# Altium PCB InstallGuide.PcbDoc
Units mil, origin at the board's own origin, x right, y up, seen from the top; angles counter-clockwise.
Board outline 1360 x 1305 mil, 2 copper layers (Top Layer, Bottom Layer); 16 components, 9 nets, 96 pads, 18 vias.
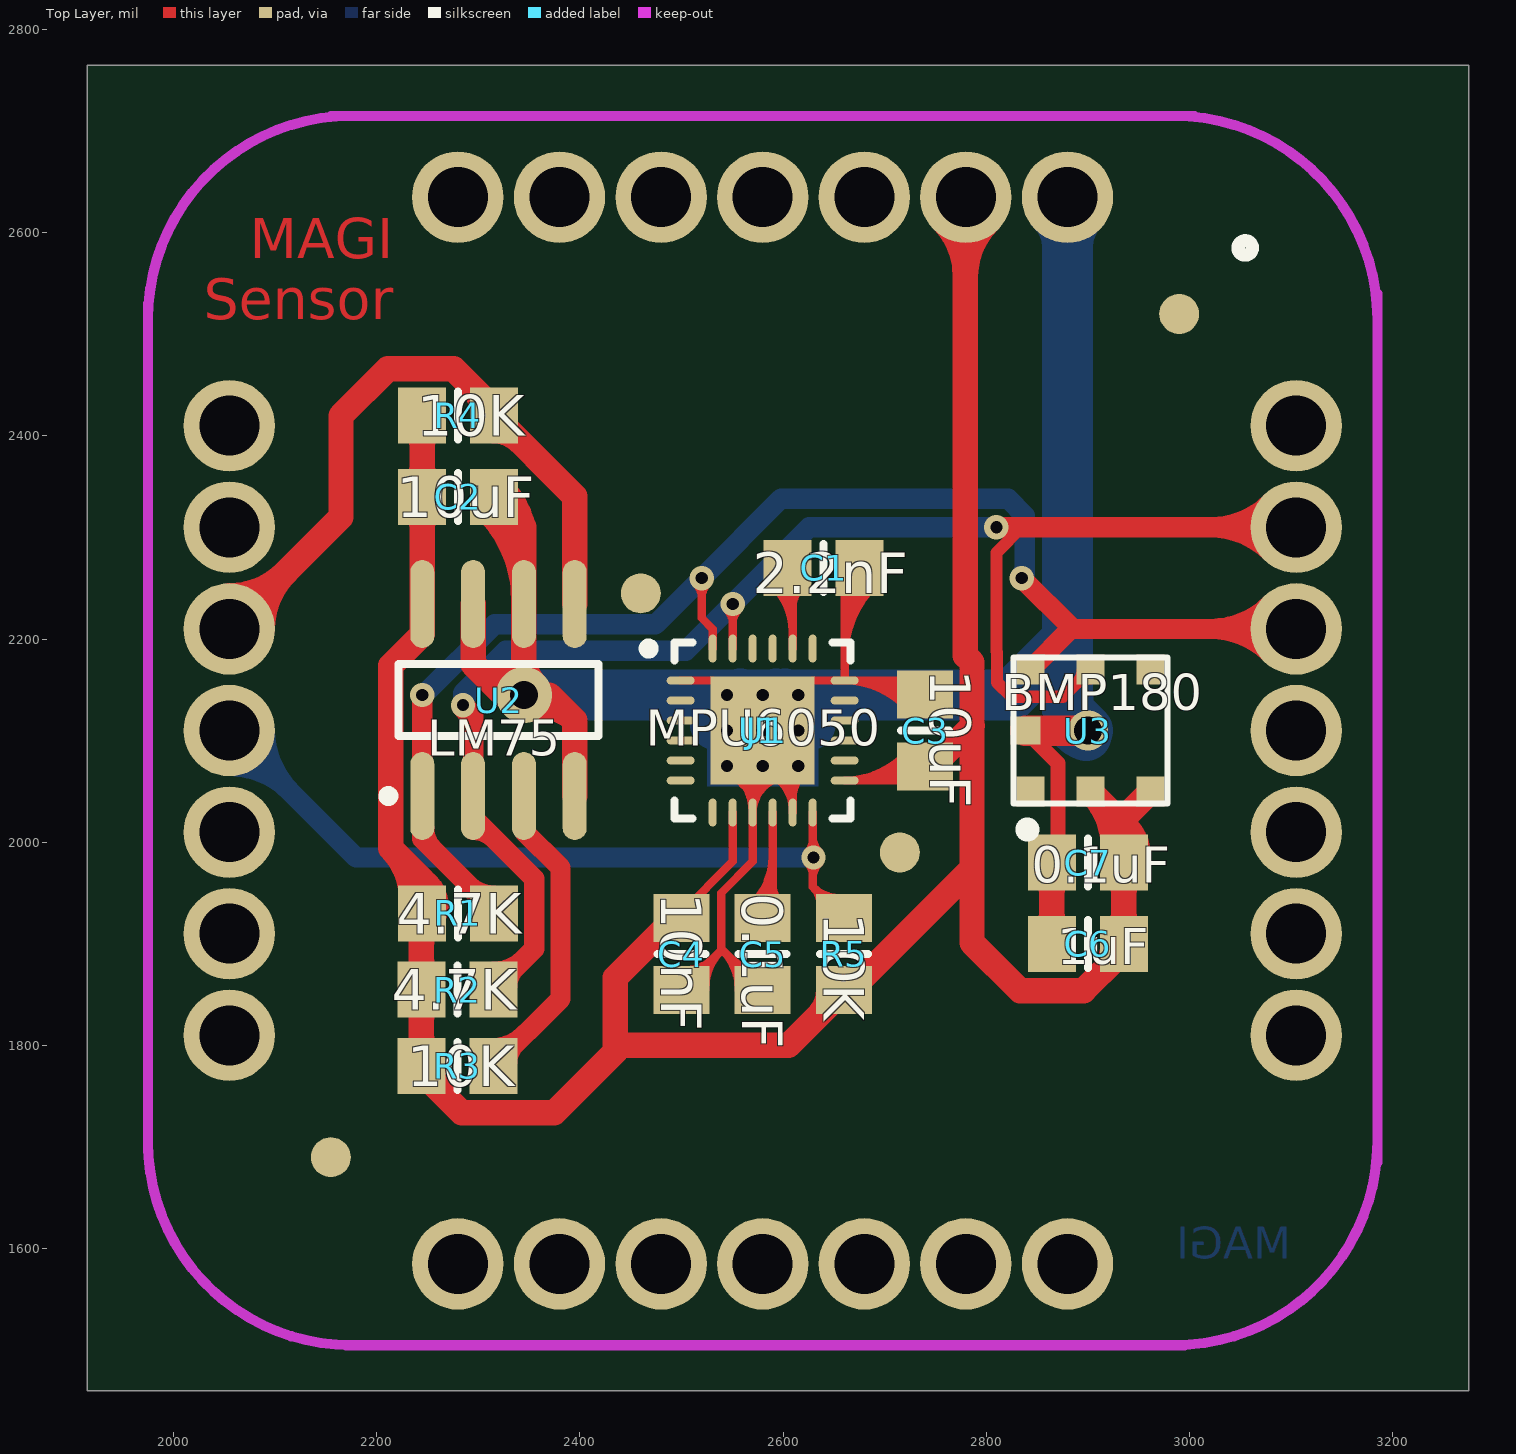
[diagram p0: Top Layer view]
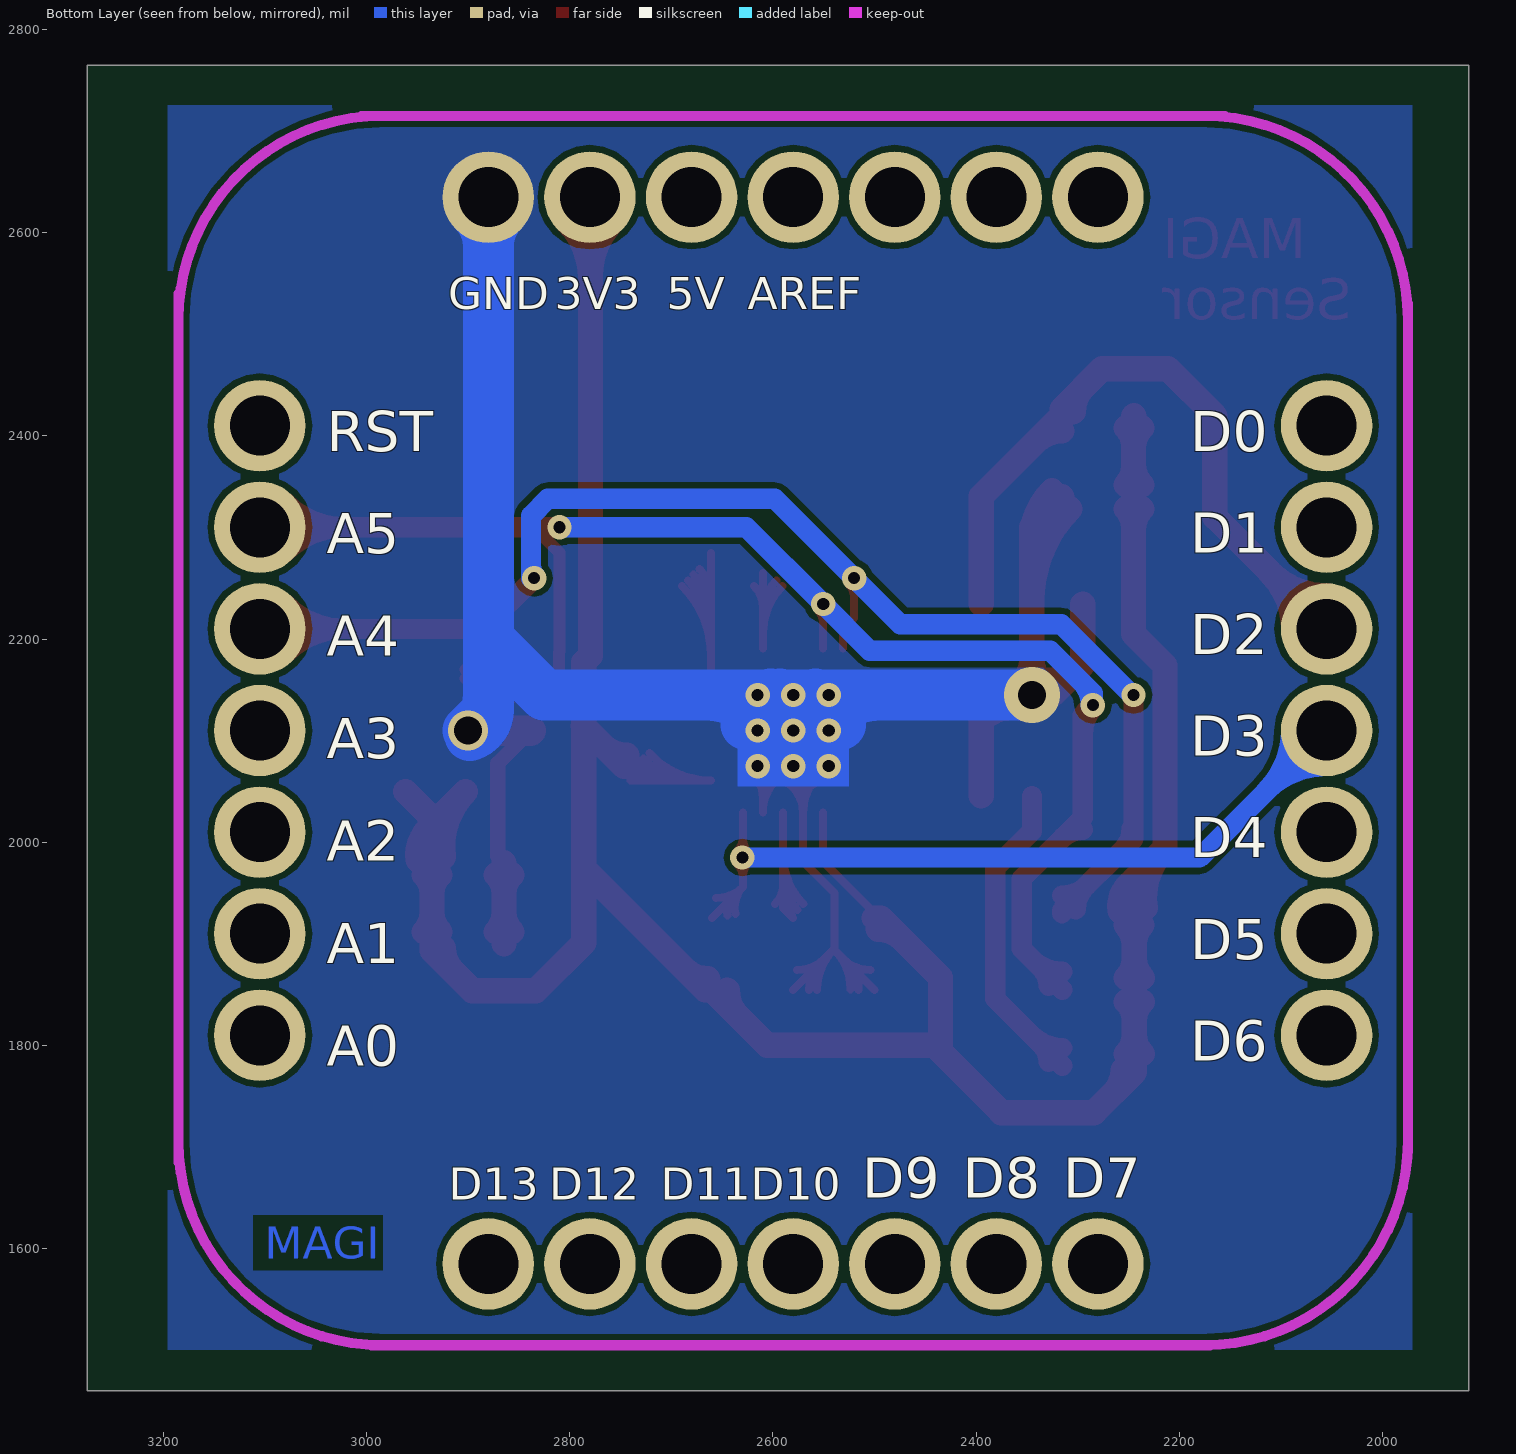
[diagram p1: Bottom Layer view, seen from below]

## Layer stack, top to bottom
Top Solder: solder mask 0.4, Solder Resist, Dk 3.5
Top Layer: signal copper 1.4
Dielectric 1: dielectric 12.6, FR-4, Dk 4.8
Bottom Layer: signal copper 1.4
Bottom Solder: solder mask 0.4, Solder Resist, Dk 3.5

## Board outline
1915,2765 1915,1460 3255,1460 3275,1460 3275,2765

## Design rules (kind name [scope] priority, off if disabled: settings)
Clearance [All] p1: gap=6
PolygonConnect PolygonConnect_1 [InNet('GND')] p1: connectstyle=Direct reliefconductorwidth=10 reliefentries=4 polygonreliefangle="90 Angle" airgapwidth=10
PolygonConnect [All] p2: connectstyle=Relief reliefconductorwidth=10 reliefentries=4 polygonreliefangle="90 Angle" airgapwidth=10
RoutingVias [All] p1: holewidth=28 width=50 viastyle="Through Hole" minholewidth=28 minwidth=50 maxholewidth=28 maxwidth=50
SolderMaskExpansion [All] p1: expansion=4
Width [All] p1: maxlimit=100 minlimit=6 preferedwidth=30
29 further rules are at their usual default settings.

## Components (designator, comment, footprint, x,y, rotation, side; value= is the part's Value field where it differs from the comment)
C1 "1uf" 6-0805_N 2640,2270 r180 top
C2 "1uf" 6-0805_N 2280,2340 r180 top
C3 "1uf" 6-0805_N 2740,2110 r270 top
C4 "1uf" 6-0805_N 2500,1890 r90 top
C5 "1uf" 6-0805_N 2580,1890 r90 top
C6 "0.1uf" 6-0805_N 2900,1900 r0 top
C7 "0.1uf" 6-0805_N 2900,1980 r0 top
J1 "MAGIsBoard" MAGIsBoard 2580,2110 r0 top
R1 "RES1_1" 6-0805_N 2280,1930 r0 top
R2 "RES1_1" 6-0805_N 2279.57,1855 r0 top
R3 "RES1_1" 6-0805_N 2279.57,1780 r0 top
R4 "RES1_1" 6-0805_N 2280,2420 r0 top
R5 "RES1_1" 6-0805_N 2660,1890 r90 top
U1 "MPU6050" MPU6050 2580,2110 r0 top
U2 "LM92" 8S1_N 2320,2140 r90 top
U3 "BMP180" BMP180 2900,2110 r0 top

## Footprints (in the part's own frame and the unit in brackets; to place one, negate y for a bottom-side part, rotate by r counter-clockwise, add the part's x,y. Pads: shape width x height; smd on the part's side, far side on the other; paste and mask are expansions set on the pad)
6-0805_N [mm] "Chip Resistor, Body 2.0x1.2mm, IPC Medium Density"
  rect 1.2x1.4 smd: 1(-0.9,0) 2(0.9,0)
  silkscreen extent 0,-0.6 0,0.6, body extent -1.07,-0.7 1.07,0.7, height 0.7
8S1_N [mm] "SOIC, 8-Leads, Body 4.9x3.9mm, Pitch 1.27mm, IPC Medium Density"
  oval 2.2x0.6 smd: 1(-2.4,1.905) 2(-2.4,0.635) 3(-2.4,-0.635) 4(-2.4,-1.905) 5(2.4,-1.905) 6(2.4,-0.635) 7(2.4,0.635) 8(2.4,1.905)
  silkscreen extent -2.52,-2.5 0.9,2.88, body extent -2,-2.5 2,2.5, height 1.75
BMP180 [mm]
  rect 0.7x0.75 smd: 1(-1.438,-1.525) 2(0.062,-1.525) 3(1.563,-1.525) 4(1.563,1.525) 5(0.062,1.525) 6(-1.438,1.525)
  rect 0.75x0.7 smd: 7(-1.562,0)
  silkscreen extent -1.86,-2.52 1.99,1.83
MAGIsBoard [mil]
  round 90 hole 59.06: 1(300,525) 2(200,525) 3(100,525) 4(0,525) 5(-100,525) 6(-200,525) 7(-300,525) 8(-525,300) 9(-525,200) 10(-525,100) 11(-525,0) 12(-525,-100) 13(-525,-200) 14(-525,-300) 15(-300,-525) 16(-200,-525) 17(-100,-525) 18(0,-525) 19(100,-525) 20(200,-525) 21(300,-525) 22(525,-300) 23(525,-200) 24(525,-100) 25(525,0) 26(525,100) 27(525,200) 28(525,300)
  Keep-Out Layer lines w10: -605,-415 -605,290 -605,420 ; -605,-405 ccw(c-405,-405) -405,-605 ; -605,405 cw(c-405,405) -405,605 ; -425,605 425,605 ; -410,-605 415,-605 ; 405,-605 ccw(c405,-405) 605,-405 ; 405,605 cw(c405,405) 605,405 ; 605,-425 605,430
  silkscreen extent 468,468 482,482
MPU6050 [mm] "QFN, 24-Leads, Body 4.00x4.00mm, Pitch 0.50mm, Thermal Pad 2.60x2.70mm, IPC Medium Density"
  oval 0.7x0.2 smd: 1(-2.05,1.25) 2(-2.05,0.75) 3(-2.05,0.25) 4(-2.05,-0.25) 5(-2.05,-0.75) 6(-2.05,-1.25) 13(2.05,-1.25) 14(2.05,-0.75) 15(2.05,-0.25) 16(2.05,0.25) 17(2.05,0.75) 18(2.05,1.25)
  oval 0.2x0.7 smd: 7(-1.25,-2.05) 8(-0.75,-2.05) 9(-0.25,-2.05) 10(0.25,-2.05) 11(0.75,-2.05) 12(1.25,-2.05) 19(1.25,2.05) 20(0.75,2.05) 21(0.25,2.05) 22(-0.25,2.05) 23(-0.75,2.05) 24(-1.25,2.05)
  rect 2.6x2.7 smd: 25(0,0)
  silkscreen extent -2.97,-2.2 2.2,2.2, body extent -2.05,-2.05 2.05,2.05, height 0.95

## Part data
C1 C2 C3 C4 C5 C6 C7: library part CAP_1, "Capacitor"
U2: library part ATtiny13A

## Free pads (board coordinates)
  round 39.37 smd mask+19.68: 10(2990,2520) 11(2155,1690) 12(2715,1990) 13(2460,2245)

## Via types
v1: diameter 24, hole 12, Top Layer to Bottom Layer, 16 vias
v2: diameter 55.12, hole 27.56, Top Layer to Bottom Layer, 1 vias
v3: diameter 39.37, hole 27.56, Top Layer to Bottom Layer, 1 vias

## Nets (pads, with @x,y where several pads share a name; then routed paths per layer and width w, separated by ;. In a path a pad name is that pad's centre, name@x,y a point inside that pad or via, vN(x,y) a via of type N, cw(c..) or ccw(c..) an arc to the next point about the centre after c; other vN are vias at no path point)
3.3V: C2.2 C3.2 C4.2 C6.2 C7.2 J1.2 R1.1 R2.1 R3.1 R4.1 R5.1 U1.8 U1.13 U2.8 U3.2 U3.3 | length 4113.6
  Top Layer w8: C4.2 2500,1930.56 2550.47,1981.03 U1.8 ; 2678.76,2060.79 ccw(c2678.76,2126.5) C3.2@2727.45,2082.37 ; 2696.81,2060.79 ccw(c2696.81,2110.14) C3.2@2733.38,2077 ; C3.2@2714.85,2060.79 ccw(c2714.85,2093.79) C3.2@2739.31,2071.63 ; C3.2@2721.52,2087.74 cw(c2660.71,2142.86) U1.13 C3.2@2740,2060.79
  Top Layer w25: R1.1@2233.56,1935.5 ccw(c2165.14,1945.21) 2214,1994.07 ; R3.1@2236.27,1791.8 ccw(c2217.28,1810.79) 2244.13,1810.79 ccw(c2270.98,1810.79) R3.1@2252,1791.8 ; R2.1@2236.27,1843.2 cw(c2217.28,1824.21) 2244.13,1824.21 cw(c2270.98,1824.21) R2.1@2252,1843.2 ; R2.1@2236.27,1866.8 ccw(c2217.28,1885.79) 2244.13,1885.79 ccw(c2270.98,1885.79) R2.1@2252,1866.8 ; R1.1@2236.7,1918.2 cw(c2218.76,1900.26) 2244.13,1900.26 ; R1.1@2236.7,1941.8 ccw(c2217.72,1960.79) 2244.57,1960.79 ccw(c2271.42,1960.79) R1.1@2252.43,1941.8 ; C2.2@2236.7,2328.2 cw(c2216.67,2308.17) 2245,2308.17 ; C2.2@2236.7,2351.8 ccw(c2216.67,2371.83) 2245,2371.83 ; R4.1@2236.7,2408.2 cw(c2216.67,2388.17) 2245,2388.17 ; 2244.13,1898.17 cw(c2272.46,1898.17) R1.1@2252.43,1918.2 ; R4.1 2245,2419.57 U2.8 2245,2205 2214,2174 2214,1994.07 ; 2245,2310.26 cw(c2270.37,2310.26) C2.2@2252.43,2328.2 ; 2245,2369.74 ccw(c2270.37,2369.74) C2.2@2252.43,2351.8 ; 2245,2390.26 cw(c2270.37,2390.26) R4.1@2252.43,2408.2 ; 2249.4,1958.67 cw(c2227.14,1936.41) R1.1@2258.31,1931.99 ; R3.1@2255.26,1776.06 ccw(c2288.24,1776.06) R3.1@2264.92,1752.74 ; C4.2@2472.74,1904.65 cw(c2496.06,1881.33) C4.2@2496.06,1914.31 ; C4.2 2493.52,1925.43 2435,1866.91 2435,1800.43 ; 2634.29,1828.86 ccw(c2608.59,1854.57) R5.1@2644.94,1854.57 ; R5.1@2663.94,1865.69 ccw(c2663.94,1898.67) R5.1@2687.26,1875.35 ; C3.2 2746.48,2074.57 2786.49,2114.57 ; C3.2@2743.94,2085.69 ccw(c2743.94,2118.67) C3.2@2767.26,2095.35 ; J1.2@2757.02,2612.02 cw(c2702.75,2557.75) 2779.5,2557.75 ; 2779.5,2555.33 cw(c2859.67,2555.33) J1.2@2802.98,2612.02 ; J1.2 2779.5,2634.5 2779.5,2183.78 2786.06,2177.22 2786.06,1974.15 ; C6.2@2914.65,1872.74 ccw(c2891.33,1896.06) C6.2@2924.31,1896.06 ; C7.2@2924.41,1985.38 ccw(c2847.91,1995.41) U3.2 2935.43,2016.99 ; C6.2@2927.57,1911.8 ccw(c2908.58,1930.79) 2935.43,1930.79 ccw(c2962.28,1930.79) C6.2@2943.3,1911.8 ; C7.2@2927.57,1968.2 cw(c2908.58,1949.21) 2935.43,1949.21 cw(c2962.28,1949.21) C7.2@2943.3,1968.2 ; 2938.34,2014.08 cw(c2911.35,1987.09) C7.2@2949.19,1982.13 ; U3.3 2935.43,2023.88 2935.43,2016.99 ; 2214,1994.07 2244.57,1963.5 R1.1 2244.13,1929.57 R2.1 R3.1 2244.13,1773.52 2283.72,1733.94 2375,1733.94 2435,1793.94 2435,1800.43 ; 2435,1800.43 2605.01,1800.43 2605.43,1800 R5.1 2666.48,1854.57 2786.06,1974.15 ; 2786.06,1974.15 2786.06,1901.16 2833.28,1853.94 2895.85,1853.94 2935.43,1893.52 C6.2 C7.2 2935.43,2016.99 ; C7.2@2927.57,1991.8 ccw(c2908.58,2010.79) 2935.43,2010.79 ; C7.2@2927.57,1991.8 ccw(c2908.58,2010.79) 2935.43,2010.79 ; C7.2@2927.57,1991.8 ccw(c2908.58,2010.79) 2935.43,2010.79 ; 2935.43,2010.79 ccw(c2962.28,2010.79) C7.2@2943.3,1991.8 ; 2935.43,2010.79 ccw(c2962.28,2010.79) C7.2@2943.3,1991.8 ; 2935.43,2010.79 ccw(c2962.28,2010.79) C7.2@2943.3,1991.8
GND: C1.1 C2.1 C3.1 C4.1 C5.1 C6.1 C7.1 J1.1 U1.1 U1.9 U1.11 U1.18 U1.25 U2.4 U2.6 U2.7 U3.7 | length 5274
  Top Layer w8: U1.1 2530.79,2159.21 v1(2580,2110) 2629.21,2159.21 U1.18 ; C4.1 2539.24,1893.81 ; C4.1@2503.94,1874.19 ccw(c2503.94,1912.06) 2530.71,1885.28 ; C4.1@2515.56,1854.78 cw(c2551,1855.44) 2525.93,1880.5 ; C4.1@2523.56,1854.93 cw(c2577.13,1855.92) 2539.24,1893.81 ; U1.25@2537,2145 ccw(c2517.69,2145) 2531.34,2158.66 ccw(c2545,2172.31) U1.25@2545,2153 ; 2539.78,1894.78 cw(c2499.56,1854.57) C5.1@2556.44,1854.57 ; U1.25@2543.67,2067.11 cw(c2539.25,2041.03) 2560.82,2056.35 ; v1(2545,2075) cw(c2547.86,2057.76) U1.25@2562.1,2067.88 ; U1.25@2545,2137 cw(c2545,2117.69) 2558.66,2131.34 cw(c2572.31,2145) U1.25@2553,2145 ; U1.25@2546.31,2067.11 cw(c2550.18,2043.7) U1.25@2569.52,2057.45 ; 2549.29,1885.28 ccw(c2576.06,1912.06) C5.1@2576.06,1874.19 ; U1.25@2549.93,2071.68 cw(c2514.36,2028.68) 2570.16,2028.68 cw(c2606.7,2028.68) U1.25@2595.04,2063.31 ; U1.25@2552.89,2073.67 ccw(c2564.89,2071.64) U1.25@2554.97,2064.58 ; 2553.44,1881.13 cw(c2526.88,1854.57) C5.1@2564.44,1854.57 ; U1.25@2555.03,2077.84 cw(c2528.42,2045.68) 2570.16,2045.68 ; U1.9@2570.16,2031.92 cw(c2623.08,2031.92) U1.25@2585.66,2069.34 ; U1.9@2570.16,2039.81 cw(c2602.95,2039.81) U1.25@2592.49,2070.9 ; 2570.16,2050.95 cw(c2599.21,2050.95) U1.25@2589.94,2078.48 ; 2570.16,2051.24 cw(c2603.76,2051.24) v1(2580,2075) ; U1.25@2572,2110 ccw(c2552.69,2110) 2566.34,2123.66 ccw(c2580,2137.31) 2580,2118 ccw(c2580,2137.31) 2593.66,2123.66 ccw(c2607.31,2110) U1.25@2588,2110 ; U1.25@2572.26,2072.96 cw(c2564.42,2070.89) U1.25@2570.16,2065.16 ; 2572.67,2044.74 ccw(c2548.59,2058.23) U1.25@2572.94,2071.23 ; U1.25@2576.41,2069.02 cw(c2573.07,2032.71) U1.11@2609.53,2032.71 ; U1.25@2577.14,2076.98 cw(c2573.88,2041.48) U1.11@2609.53,2041.48 ; U1.25@2577.88,2084.95 cw(c2574.68,2050.25) 2609.53,2050.25 ; U1.25@2577.96,2067.26 ccw(c2575.89,2059.42) U1.25@2570.16,2065.16 ; U1.25@2578.61,2092.91 cw(c2575.49,2059.02) U1.25@2609.53,2059.02 ; U1.25@2579.82,2057.5 ccw(c2563.92,2066.41) v1(2580,2075) ; C5.1 2539.24,1895.32 ; U1.25@2583.17,2091.51 ccw(c2608.05,2121.28) U1.25@2613.81,2082.91 ; U1.25@2585.46,2082.11 ccw(c2598.32,2098.89) U1.25@2610.42,2081.56 ; U1.25@2585.58,2069.26 cw(c2590.87,2063.82) 2593.5,2070.94 cw(c2596.77,2079.81) U1.25@2587.69,2077.2 ; U1.25@2588.71,2064.48 cw(c2593.42,2077.24) v1(2580,2075) ; U1.25@2594.13,2075.46 ccw(c2604.88,2089.49) v1(2615,2075) ; U1.25@2596.81,2080.11 ccw(c2611.58,2097.77) v1(2615,2075) ; U1.25@2602.8,2068.81 ccw(c2611.44,2080.09) U1.25@2619.58,2068.44 ; U1.25@2607,2145 cw(c2587.69,2145) 2601.34,2131.34 cw(c2615,2117.69) U1.25@2615,2137 ; U1.11 2609.53,2069.53 v1(2615,2075) ; U1.11@2609.53,2042.47 cw(c2647.53,2042.47) U1.25@2620.66,2069.34 ; U1.25@2609.53,2061.79 cw(c2628.21,2061.79) v1(2615,2075) ; U1.25@2609.53,2065.41 cw(c2622.62,2065.41) U1.25@2613.36,2074.67 ; U1.25@2615,2153 ccw(c2615,2172.31) 2628.66,2158.66 ccw(c2642.31,2145) U1.25@2623,2145 ; 2660.71,2183.14 cw(c2758.35,2183.14) C1.1@2689.31,2252.19 ; 2660.71,2202.46 cw(c2739.04,2202.46) C1.1@2683.65,2257.84 ; 2660.71,2221.77 cw(c2719.73,2221.77) C1.1@2677.99,2263.5 ; 2660.71,2241.08 cw(c2700.41,2241.08) C1.1@2672.34,2269.16 ; C1.1@2660.71,2284.72 U1.18 ; 2678.76,2159.21 cw(c2678.76,2093.5) C3.1@2727.45,2137.63 ; 2696.81,2159.21 cw(c2696.81,2109.86) C3.1@2733.38,2143 ; C3.1@2714.85,2159.21 cw(c2714.85,2126.21) C3.1@2739.31,2148.37 ; C3.1@2721.52,2132.26 ccw(c2660.71,2077.14) U1.18 ; C3.1@2756.22,2159.21 U1.18 ; 2539.24,1893.81 2539.24,1895.32 ; 2539.24,1895.32 2539.24,1950 2570.16,1980.91 U1.9 U1.25@2570.16,2065.16 ; U1.25@2570.16,2065.16 v1(2580,2075)
  Top Layer w15: U3.7 2870.69,2077.8 2870.69,1986.12 C7.1 ; U3.7@2845.75,2110 ccw(c2863.28,2110) U3.7@2850.88,2097.6
  Top Layer w25: U2.7 2295,2175 ; C2.1@2307.57,2328.2 cw(c2217.2,2237.83) U2.6@2345,2237.83 ; C2.1@2315.43,2324.94 cw(c2315.43,2288.59) 2341.14,2314.29 ; C2.1 2345,2310.43 U2.6 2345,2147.5 v2@2347.5,2145 ; C2.1@2325.25,2345.88 cw(c2277.56,2298.19) 2345,2298.19 ; v2@2334.35,2155.65 ccw(c2308.64,2181.36) 2345,2181.36 ccw(c2381.36,2181.36) v2@2355.65,2155.65 ; v2@2342.49,2159.85 cw(c2333.42,2213.42) 2295,2175 ; v2@2349.75,2130.71 cw(c2363.7,2088.7) 2395,2120 ; U2.4 2395,2120 ; C6.1@2856.7,1911.8 ccw(c2837.72,1930.79) 2864.57,1930.79 ccw(c2891.42,1930.79) C6.1@2872.43,1911.8 ; C7.1@2856.7,1968.2 cw(c2837.72,1949.21) 2864.57,1949.21 cw(c2891.42,1949.21) C7.1@2872.43,1968.2 ; C6.1 C7.1 ; 2295,2175 2325,2145 v2(2345,2145) v2@2347.5,2145 ; v2@2347.5,2145 2370,2145 2395,2120
  Top Layer w30: U3.7 v3(2900,2110)
  Bottom Layer w50: v2(2345,2145) v1(2580,2145) ; 2491.89,2145 cw(c2491.89,2056.89) 2554.19,2119.19 ; 2526.89,2145 cw(c2526.89,2056.89) 2589.19,2119.19 ; 2533.29,2115.64 cw(c2580,2093.16) v1(2580,2145) ; 2538.8,2133.57 ccw(c2540.05,2135.87) 2540.79,2133.36 ; 2540.93,2132.3 ccw(c2544.46,2145.92) 2551.59,2133.8 ; 2556.8,2142.38 ccw(c2553.22,2145.53) 2557.97,2145.84 ; 2568.29,2115.64 cw(c2615,2093.16) v1(2615,2145) ; 2573.8,2133.57 ccw(c2575.05,2135.87) 2575.79,2133.36 ; 2575.93,2132.3 ccw(c2579.46,2145.92) 2586.59,2133.8 ; 2591.8,2142.38 ccw(c2588.22,2145.53) 2592.97,2145.84 ; 2602.03,2145.84 ccw(c2606.78,2145.53) 2603.2,2142.38 ; 2605.81,2119.19 cw(c2668.11,2056.89) 2668.11,2145 ; 2608.41,2133.8 ccw(c2615.54,2145.92) 2619.07,2132.3 ; 2619.21,2133.36 ccw(c2619.95,2135.87) 2621.2,2133.57 ; 2626.71,2115.64 ccw(c2580,2093.16) v1(2580,2145) ; J1.1@2865.86,2620.86 cw(c2831.72,2586.72) 2880,2586.72 cw(c2928.28,2586.72) J1.1@2894.14,2620.86 ; 2880,2145.45 ccw(c2935.45,2145.45) v3@2896.24,2106.24 ; J1.1 2880,2200 ; v3@2898.41,2104.93 cw(c2906.28,2130) 2880,2130 ; v3(2900,2110) 2880,2130 ; v1(2580,2145) v1(2615,2145) ; v1(2615,2145) 2825,2145 2880,2200 ; 2880,2130 2880,2200
  other v1: 2545,2110 2615,2110 2545,2145
INT0: J1.10 R4.2 U2.5 | length 844.1
  Top Layer w25: J1.10 2165,2320 2165,2420 2211.06,2466.06 2275.85,2466.06 2315.43,2426.48 R4.2 2395,2340.43 U2.5 ; J1.10@2055,2242.5 ccw(c2055,2320.96) 2110.48,2265.48 ccw(c2165.96,2210) J1.10@2087.5,2210 ; R4.2@2294.65,2447.26 cw(c2271.33,2423.94) R4.2@2304.31,2423.94 ; R4.2@2315.43,2404.94 cw(c2315.43,2368.59) 2341.14,2394.29
INT1: J1.11 R5.2 U1.12 | length 1014.8
  Top Layer w8: v1@2624.34,1979.34 cw(c2612.59,1967.59) 2629.21,1967.59 ; v1@2624.34,1990.66 ccw(c2612.59,2002.41) 2629.21,2002.41 ; 2629.21,1963.79 cw(c2651.21,1963.79) v1@2635.66,1979.34 ; 2629.21,2006.21 ccw(c2651.21,2006.21) v1@2635.66,1990.66 ; U1.12 2629.21,1956.22 ; 2629.29,1956.15 ccw(c2656.06,1982.92) R5.2@2656.06,1945.06 ; R5.2@2636.91,1929.71 ccw(c2608.96,1935.96) 2629.21,1956.22 ; R5.2@2639.5,1945.93 cw(c2625.78,1932.2) R5.2@2644.72,1927.97 ; R5.2 2629.21,1956.22
  Bottom Layer w20: J1.11@2055,2075 cw(c2055,1990.5) 2114.75,2050.25 cw(c2174.5,2110) J1.11@2090,2110 ; J1.11 2180,1985 v1(2630,1985)
NetC1_2: C1.2 U1.20 | length 184.1
  Top Layer w8: C1.2@2590.69,2252.19 cw(c2545.22,2206.72) 2609.53,2206.72 ; C1.2@2596.35,2257.84 cw(c2564.53,2226.03) 2609.53,2226.03 ; U1.20 C1.2@2609.53,2265.04 ; 2609.53,2230.67 cw(c2639.96,2230.67) C1.2@2618.44,2252.19
NetC5_2: C5.2 U1.10 | length 242.9
  Top Layer w8: C5.2@2570.06,1939.31 ccw(c2522.31,1987.06) 2589.84,1987.06 ; C5.2@2575.72,1933.65 ccw(c2541.62,1967.75) 2589.84,1967.75 ; C5.2 2589.84,1935.28 U1.10 ; C5.2@2581.38,1927.99 ccw(c2560.94,1948.43) C5.2@2589.84,1948.43 ; 2589.84,1958.55 ccw(c2617.05,1958.55) C5.2@2597.81,1939.31
SCL: J1.27 R2.2 U1.23 U2.2 U3.5 | length 1881.6
  Top Layer w8: v1@2544.82,2228.87 cw(c2531.16,2215.21) 2550.47,2215.21 cw(c2569.79,2215.21) v1@2556.13,2228.87 ; U1.23 v1(2550.47,2234.53)
  Top Layer w12: 2835,2310 2810,2285 2810,2187.93 2810.56,2187.37 2810.56,2157.37 2824.66,2143.28 2875.7,2143.28 U3.5 ; 2887.5,2155.08 cw(c2902.46,2140.12) U3.5@2902.46,2161.28 ; U3.5@2889.88,2157.46 ccw(c2878.28,2169.06) U3.5@2894.68,2169.06
  Top Layer w20: v1@2283.59,2133.59 cw(c2256.03,2106.03) 2295,2106.03 ; v1@2284.67,2133.03 cw(c2282.67,2120.86) 2295,2120.86 ; v1(2285,2135) 2295,2125 U2.2 2295,2024.24 2355.06,1964.19 2355.06,1895.06 R2.2 ; U2.2@2295,2012.2 cw(c2295,1983.14) 2315.55,2003.69 ; R2.2@2315,1872.56 ccw(c2315,1914.95) 2344.98,1884.98 ; R2.2@2328.62,1858.94 cw(c2352,1858.94) R2.2@2335.47,1875.47 ; v1(2810,2310) 2835,2310 J1.27 ; J1.27@3080.25,2285.25 ccw(c3020.5,2225.5) 3020.5,2310 ccw(c3020.5,2394.5) J1.27@3080.25,2334.75
  Bottom Layer w20: v1(2285,2135) 2285,2146.6 2326.96,2188.56 2504.5,2188.56 v1(2550.47,2234.53) 2625.94,2310 v1(2810,2310) ; v1@2287,2135 cw(c2319.84,2135) 2296.62,2158.22
SDA: J1.26 R1.2 U1.24 U2.1 U3.6 | length 1628.3
  Top Layer w8: v1@2514.34,2254.34 cw(c2500.69,2240.69) 2520,2240.69 cw(c2539.31,2240.69) v1@2525.66,2254.34 ; v1(2520,2260) 2520,2220.79 2530.79,2210 U1.24
  Top Layer w20: v1(2245,2145) U2.1 2245,2003.38 2315.43,1932.94 R1.2 ; U2.1@2246.81,2014.02 ccw(c2276.87,2014.02) 2255.62,1992.76 ; 2290.48,1957.89 ccw(c2315.43,1982.85) R1.2@2315.43,1947.56 ; R1.2@2292.88,1955.49 cw(c2271.33,1933.94) R1.2@2301.81,1933.94 ; v1(2835,2260) 2885,2210 ; U3.6 2883.37,2210 J1.26@3075,2210 ; J1.26@3080.25,2185.25 ccw(c3020.5,2125.5) 3020.5,2210 ccw(c3020.5,2294.5) J1.26@3080.25,2234.75
  Bottom Layer w20: v1(2245,2145) 2246.63,2145 2316.19,2214.56 2474.56,2214.56 v1(2520,2260) 2598,2338 2821.6,2338 2838,2321.6 v1@2838,2260 ; v1@2833.59,2261.41 ccw(c2822.93,2272.07) 2838,2272.07
TCRT: R3.2 U2.3 | length 359.5
  Top Layer w20: R3.2 2381.06,1846.06 2381.06,1974.96 2345,2011.01 U2.3 ; R3.2@2315,1797.56 ccw(c2315,1839.95) 2344.98,1809.98 ; R3.2@2328.62,1783.94 cw(c2352,1783.94) R3.2@2335.47,1800.47
pads on no net: J1.3 J1.4 J1.5 J1.6 J1.7 J1.8 J1.9 J1.12 J1.13 J1.14 J1.15 J1.16 J1.17 J1.18 J1.19 J1.20 J1.21 J1.22 J1.23 J1.24 J1.25 J1.28 U1.2 U1.3 U1.4 U1.5 U1.6 U1.7 U1.14 U1.15 U1.16 U1.17 U1.19 U1.21 U1.22 U3.1 U3.4

## Polygon pours and split planes (outlines as drawn)
GND on Bottom Layer "Keep-Out Layer-No Net" (solid, pour order 2): 1970.72,2725.45 1970.72,1500.45 3195.72,1500.45 3195.72,2725.45

## Other copper
Top Layer:
  text "MAGI" at 2075,2575 h39.37
  text "Sensor" at 2030,2515 h40
Bottom Layer:
  rectangle net GND: 2525,2055 2635,2165

## Silkscreen, mask and mechanical layers (free items; w line width, h text height)
Top Overlay:
  text "10K" at 2240,2400 h40
  text "10uF" at 2220,2320 h40
  text "2.2nF" at 2570,2245 h40
  text "10uF" at 2745,2170 h40 r270
  text "BMP180" at 2815,2130 h35.43
  text "MPU6050" at 2465,2095 h35.43
  text "LM75" at 2250,2085 h35.43
  text "0.1uF" at 2845,1960 h35.43
  text "10nF" at 2480,1950 h40 r270
  text "0.1uF" at 2560,1950 h40 r270
  text "10K" at 2640,1930 h40 r270
  text "4.7K" at 2220,1910 h40
  text "1uF" at 2870,1880 h35.43
  text "4.7K" at 2215,1835 h40
  text "10K" at 2230,1760 h40
Bottom Solder:
  rectangle: 2525,2055 2635,2165

## Text inside footprints (layer, text, board x,y; h text height)
J1: Bottom Overlay "AREF" at 2624.57,2524.84 h31.5; Bottom Overlay "5V" at 2704.57,2524.84 h31.5; Bottom Overlay "3V3" at 2814.57,2524.84 h31.5; Bottom Overlay "GND" at 2919.57,2524.84 h31.5; Bottom Overlay "RST" at 3038.98,2385.08 h39.37; Bottom Overlay "A5" at 3038.98,2284.25 h39.37; Bottom Overlay "A4" at 3038.98,2183.41 h39.37; Bottom Overlay "A3" at 3038.98,2082.58 h39.37; Bottom Overlay "A2" at 3038.98,1981.75 h39.37; Bottom Overlay "A1" at 3038.98,1880.91 h39.37; Bottom Overlay "A0" at 3038.98,1780.08 h39.37; Bottom Overlay "D13" at 2918.98,1647.95 h31.5; Bottom Overlay "D12" at 2819.98,1647.95 h31.5; Bottom Overlay "D11" at 2710.48,1647.95 h31.5; Bottom Overlay "D10" at 2621.97,1647.95 h31.5; Bottom Overlay "D9" at 2511.98,1650.08 h39.37; Bottom Overlay "D8" at 2412.98,1650.08 h39.37; Bottom Overlay "D7" at 2313.98,1650.08 h39.37; Bottom Overlay "D6" at 2188.98,1785.08 h39.37; Bottom Overlay "D5" at 2188.98,1885.08 h39.37; Bottom Overlay "D4" at 2188.98,1985.08 h39.37; Bottom Overlay "D3" at 2188.98,2085.08 h39.37; Bottom Overlay "D2" at 2188.98,2185.08 h39.37; Bottom Overlay "D1" at 2188.98,2285.08 h39.37; Bottom Overlay "D0" at 2188.98,2385.08 h39.37; Bottom Layer "MAGI" at 3100,1590 h31.5